# EAGLE board board (EAGLE 9.2.2)
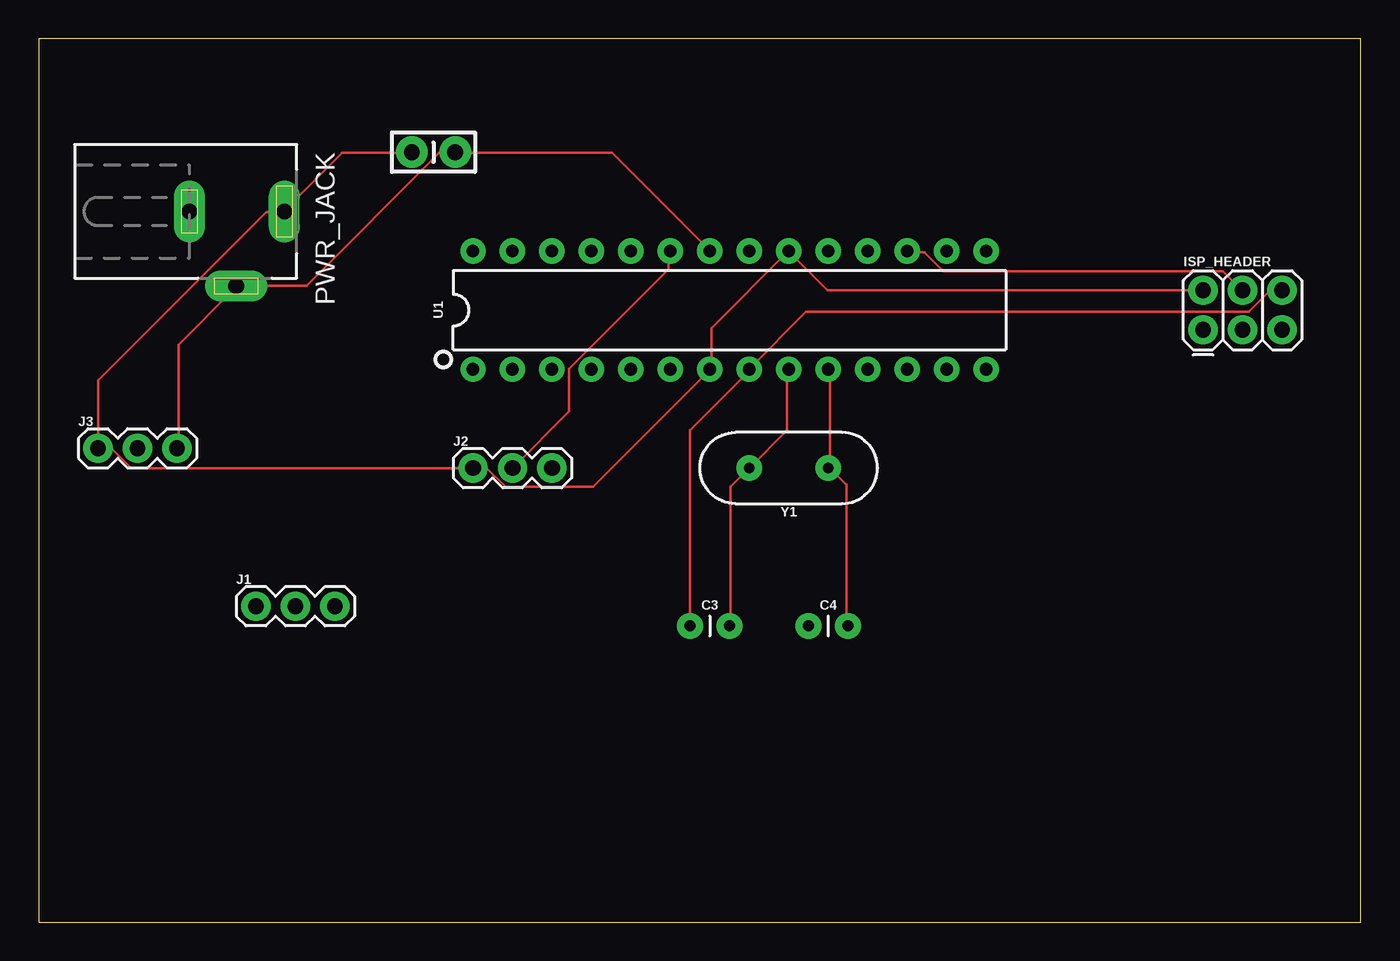
[diagram p0: board, top side]
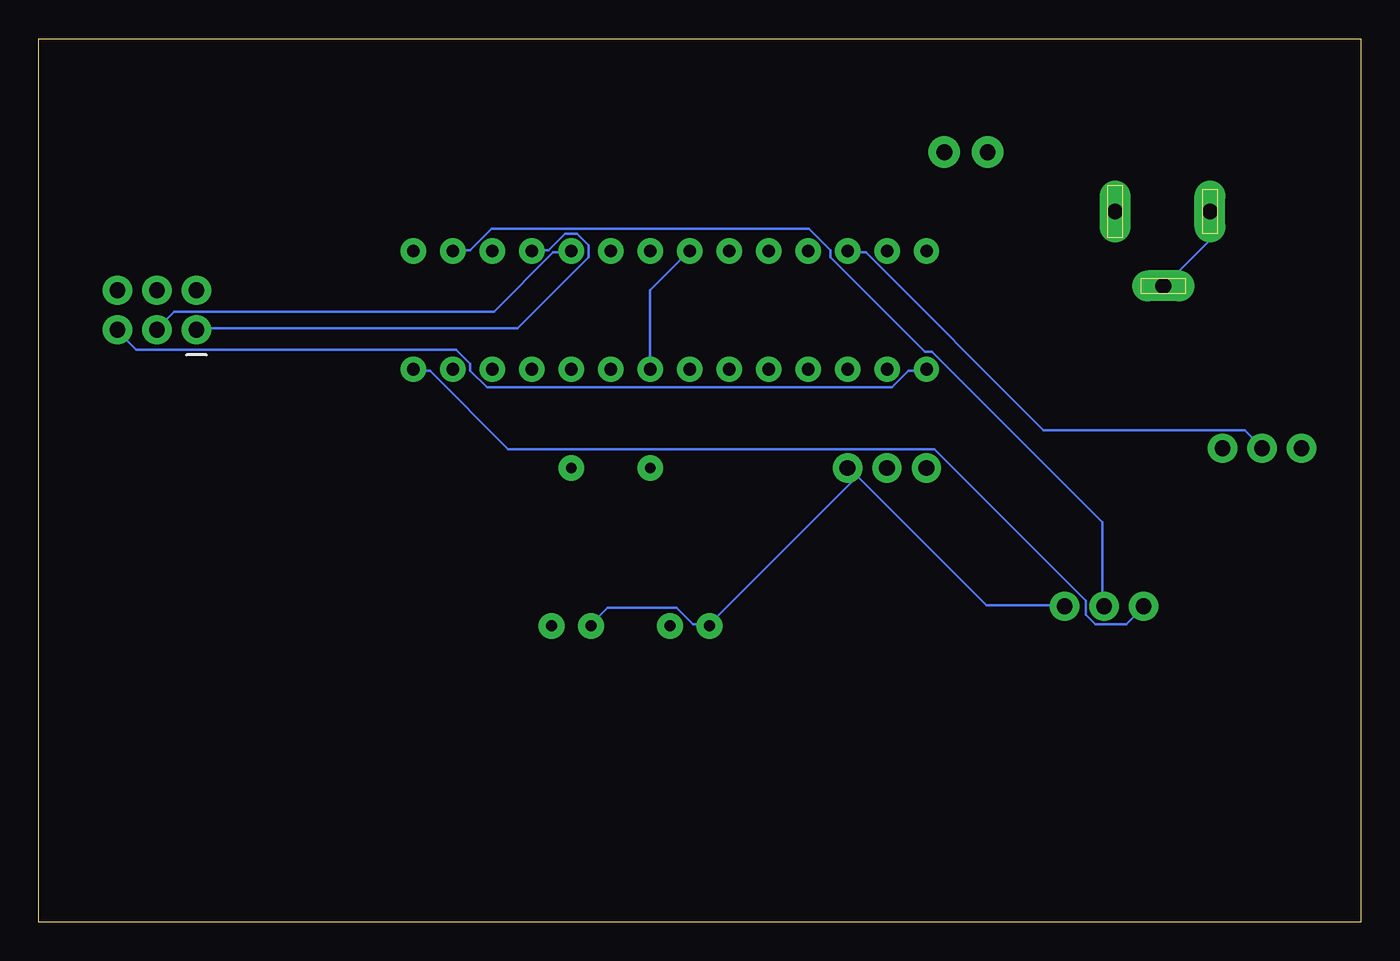
[diagram p1: board, bottom side, seen from below]

Size 85.07 x 56.82 mm. Coordinates in mm from the lower left corner, seen from the top.
Outline: 0,0 85.07,0 85.07,56.82 0,56.82 0,0
Copper layers (1*16): Top 0.035mm / dielectric 1.5mm / Bottom 0.035mm
Design rules "default": minimum track width 6mil, minimum drill 0.35mm, track to track 6mil, track to pad 6mil, pad to pad 6mil, via to via 6mil, smd to smd 6mil, copper to edge 40mil, drill to drill 6mil, minimum pad ring 10mil, minimum via ring 8mil, stop-mask expansion 4mil, vias tented up to drill 0mil, thermal gap 10mil

## Footprints (pad centres in the part's own frame; a part is rotated, then mirrored left to right if it is on the bottom)
CAP-PTH-SMALL-KIT = drill 1.016 pad 2.032: 1 -1.397,0; 2 1.397,0
CAP-PTH-2.54 = drill 0.7 pad 1.651: 1 -1.27,0; 2 1.27,0
2X3 = drill 1.016 pad 1.88: 1 0,0; 2 0,2.54; 3 2.54,0; 4 2.54,2.54; 5 5.08,0; 6 5.08,2.54
1X03 = drill 1.016 pad 1.88: 1 0,0; 2 2.54,0; 3 5.08,0
DCJ0202 = drill 1 pad 2 long: 1 0,3.1; 2 4.8,0; 3 0,-3
DIP28 = drill 0.813 pad 1.626: 1 -16.51,-3.81; 2 -13.97,-3.81; 3 -11.43,-3.81; 4 -8.89,-3.81; 5 -6.35,-3.81; 6 -3.81,-3.81; 7 -1.27,-3.81; 8 1.27,-3.81; 9 3.81,-3.81; 10 6.35,-3.81; 11 8.89,-3.81; 12 11.43,-3.81; 13 13.97,-3.81; 14 16.51,-3.81; 15 16.51,3.81; 16 13.97,3.81; 17 11.43,3.81; 18 8.89,3.81; 19 6.35,3.81; 20 3.81,3.81; 21 1.27,3.81; 22 -1.27,3.81; 23 -3.81,3.81; 24 -6.35,3.81; 25 -8.89,3.81; 26 -11.43,3.81; 27 -13.97,3.81; 28 -16.51,3.81
HC49US = drill 0.7 pad 1.651: 1 -2.54,0; 2 2.54,0

## Placement (x,y rotation side)
C1  0.1uF  [CAP-PTH-SMALL-KIT]  25.4,49.53 0 top
C3  22pF  [CAP-PTH-2.54]  43.18,19.05 0 top
C4  22pF  [CAP-PTH-2.54]  50.8,19.05 0 top
ISP_HEADER  FEMALE 2x3  [2X3]  74.93,38.1 0 top
J1  455-1750-1-ND  [1X03]  13.97,20.32 0 top
J2  455-1750-1-ND  [1X03]  27.94,29.21 0 top
J3  455-1750-1-ND  [1X03]  3.81,30.48 0 top
PWR_JACK  DCJ0202  [DCJ0202]  12.7,45.72 270 top
U1  328P  [DIP28]  44.45,39.37 0 top
Y1  16MHz  [HC49US]  48.26,29.21 180 top

## Library data of the parts
C1 = SparkFun-Capacitors; PROD_ID: CAP-08370
C3 C4 = SparkFun-Capacitors; PROD_ID: CAP-09128
ISP_HEADER = SparkFun-Connectors; PROD_ID: CONN-11566
J1-J3 = SparkFun-Connectors; PROD_ID: XXX-00000
PWR_JACK = con-jack; OC_FARNELL: unknown; OC_NEWARK: unknown
U1 = SparkFun-IC-Microcontroller; PROD_ID: IC-09136
Y1 = SparkFun-Clocks; PROD_ID: XTAL-08181; SF_ID: COM-00536

## Nets
DIRN: J1.1 U1.14
GND: C1.2 C3.1 C4.1 ISP_HEADER.6 J1.3 J2.3 J3.3 PWR_JACK.2 PWR_JACK.3 U1.8 U1.22
MISO: ISP_HEADER.1 U1.18
MOSI: ISP_HEADER.4 U1.17
N$1: C3.2 U1.9 Y1.2
N$3: C4.2 U1.10 Y1.1
POS: J2.2 U1.23
PWM: J1.2 U1.16
RESET: ISP_HEADER.5 U1.1
SCK: ISP_HEADER.3 U1.19
STEER: J3.2 U1.26
VCC: C1.1 ISP_HEADER.2 J2.1 J3.1 PWR_JACK.1 U1.7 U1.20

## Tracks (layer width: path | path; a pad name or v marks a point on that pad's centre or on a via)
DIRN
  Bottom 0.152: U1.14 60.96,35.46 59.89,35.46 54.86,30.43 27.43,30.43 17.68,20.68 17.68,19.76 17.07,19.15 15.09,19.15 14.02,20.22 J1.1
GND
  Top 0.152: J3.3 8.99,30.58 8.99,37.13 12.65,40.79 PWR_JACK.2 12.8,40.95 17.22,40.95 25.76,49.48 26.67,49.48 C1.2 26.82,49.48 36.88,49.48 U1.22 | ISP_HEADER.6 79.25,40.64 77.88,39.27 49.38,39.27 45.72,35.61 U1.8 45.72,35.46 41.91,31.65 C3.1
  Bottom 0.152: 41.91,19.15 42.98,19.15 44.04,20.22 48.46,20.22 49.53,19.15 C4.1 | 32.31,28.6 32.92,29.21 J2.3 32.31,28.6 | 32.31,28.6 24.08,20.37 19.05,20.37 J1.3 | 41.91,19.15 32.46,28.6 32.31,28.6 | 41.91,19.15 C3.1 | PWR_JACK.3 9.75,45.67 9.75,43.84 12.65,40.95 PWR_JACK.2 | U1.8 45.72,40.64 U1.22
MISO
  Bottom 0.152: U1.18 53.34,43.23 52.27,43.23 51.21,44.3 50.44,44.3 49.68,43.54 49.68,42.77 54.25,38.2 74.83,38.2 ISP_HEADER.1
MOSI
  Top 0.152: U1.17 55.93,43.08 57,43.08 58.22,41.86 76.2,41.86 77.42,40.64 ISP_HEADER.4
N$1
  Top 0.152: U1.9 48.16,35.46 48.16,31.65 Y1.2 44.5,27.99 44.5,19.15 C3.2
N$3
  Top 0.152: 50.9,29.21 50.9,35.46 U1.10 | 50.9,29.21 51.97,28.14 51.97,19.15 C4.2 | 50.9,29.21 Y1.1
POS
  Top 0.152: J2.2 34.14,32.87 34.14,35.61 40.54,42.01 40.54,43.08 U1.23
PWM
  Bottom 0.152: U1.16 58.37,43.23 57.3,43.23 55.93,44.6 35.51,44.6 34.14,43.23 34.14,42.77 28.04,36.68 27.58,36.68 16.61,25.71 16.61,20.37 J1.2
RESET
  Bottom 0.152: U1.1 28.04,35.46 29.11,35.46 30.18,34.39 56.24,34.39 57.3,35.46 57.3,35.92 58.22,36.83 78.79,36.83 80.01,38.05 ISP_HEADER.5
SCK
  Bottom 0.152: U1.19 50.9,43.08 51.97,43.08 55.78,39.27 76.35,39.27 77.42,38.2 ISP_HEADER.3
STEER
  Bottom 0.152: U1.26 32.92,43.08 31.85,43.08 20.42,31.65 7.47,31.65 6.4,30.58 J3.2
VCC
  Top 0.152: C1.1 23.93,49.48 19.51,49.48 15.85,45.82 PWR_JACK.1 15.7,45.67 14.63,45.67 3.81,34.85 J3.1 3.81,30.43 4.72,30.43 5.94,29.21 J2.1 28.8,29.21 30.02,27.99 35.66,27.99 43.13,35.46 U1.7 43.28,35.61 43.28,38.2 U1.20 48.31,43.08 50.75,40.64 ISP_HEADER.2